# Altium PCB SLD-1550-ANR.PcbDoc
Units mm, origin at the board's own origin, x right, y up, seen from the top; angles counter-clockwise.
Board outline 100 x 54 mm, 2 copper layers (Top Layer, Bottom Layer); 4 components, 4 nets, 18 pads, 0 vias.
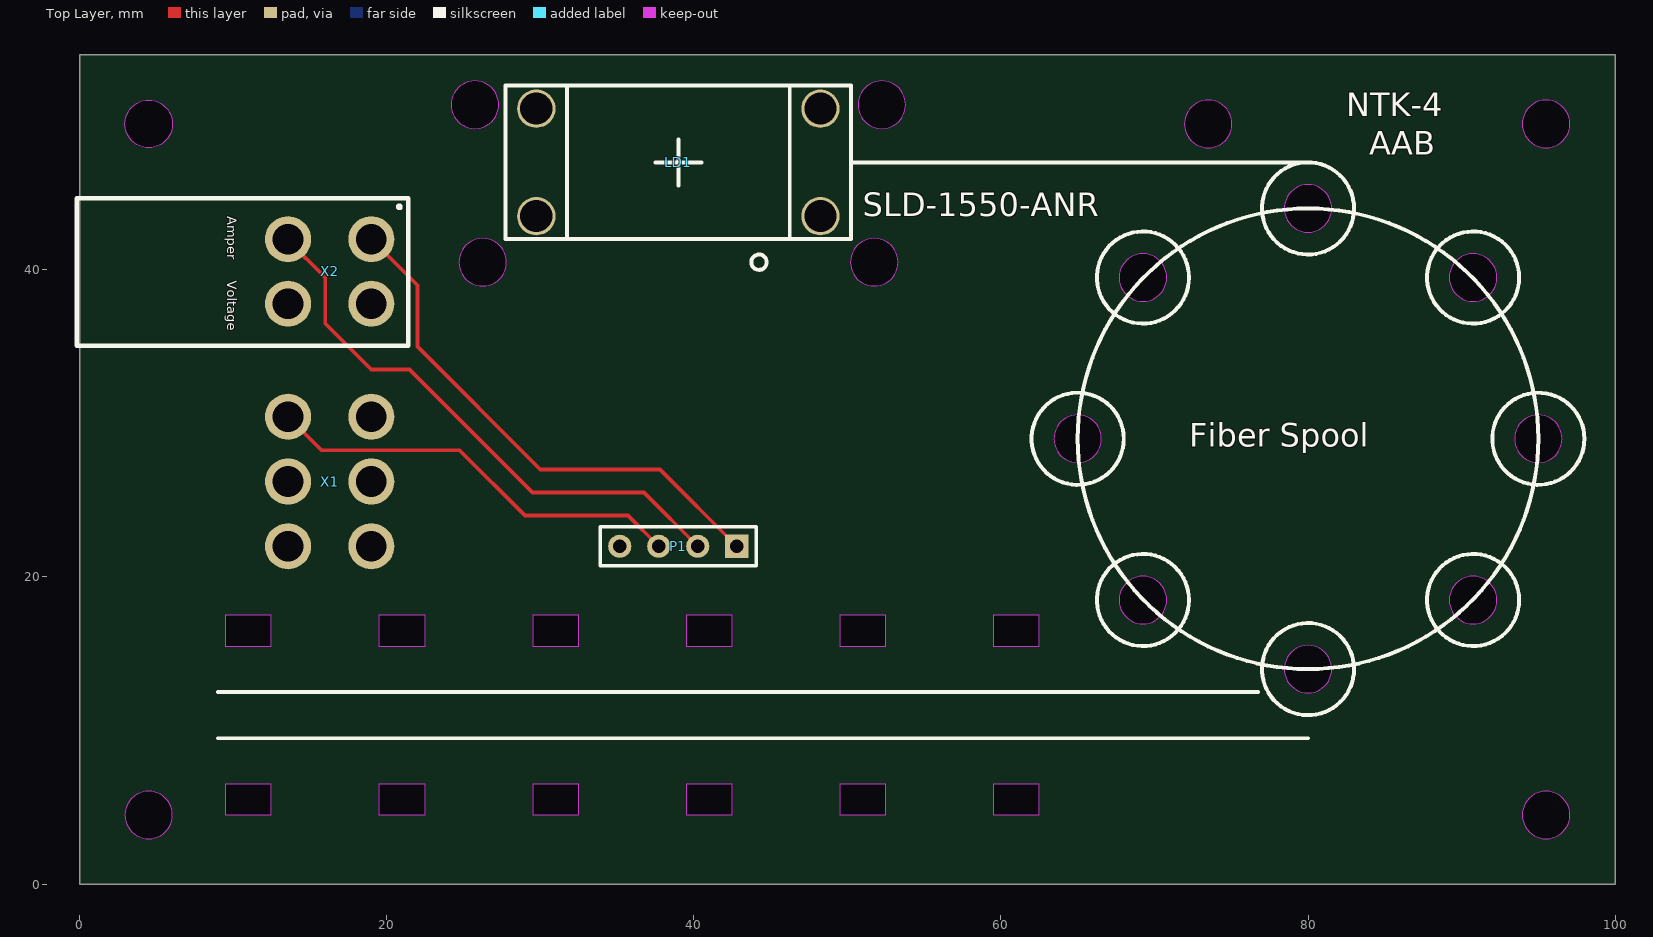
[diagram p0: Top Layer view]
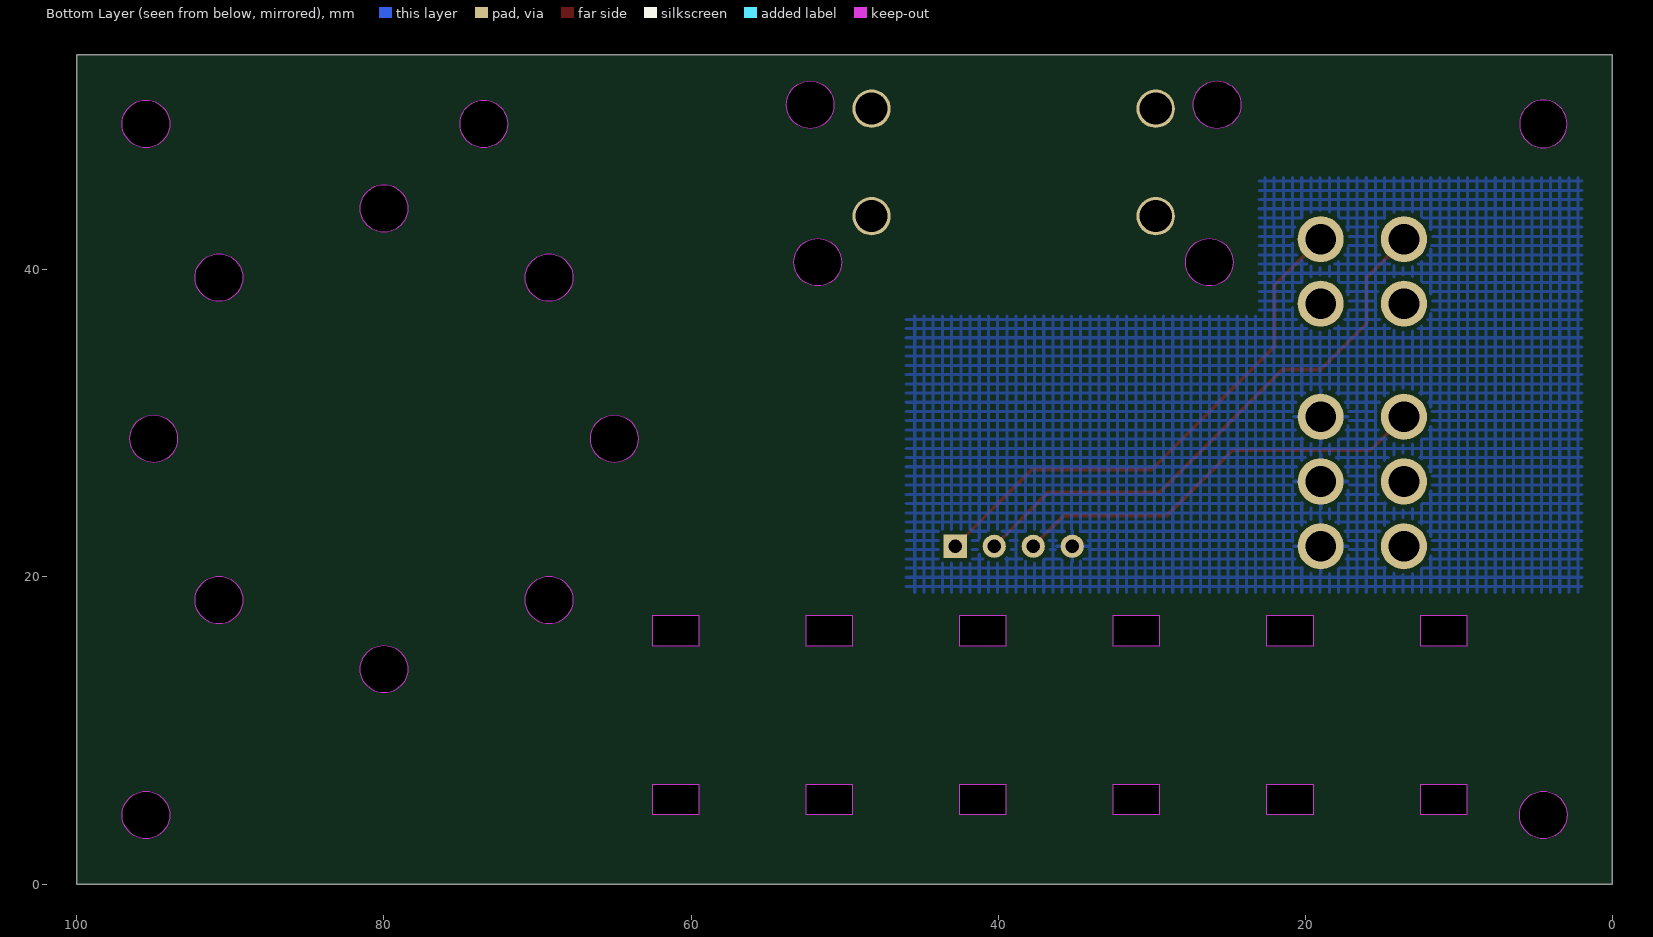
[diagram p1: Bottom Layer view, seen from below]

## Layer stack, top to bottom
Top Solder: solder mask 0.0102, Solder Resist, Dk 3.5
Top Layer: signal copper 0.0356
Dielectric 1: dielectric 0.32, FR-4, Dk 4.8
Bottom Layer: signal copper 0.0356
Bottom Solder: solder mask 0.0102, Solder Resist, Dk 3.5

## Board outline
0,0 100,0 100,54 0,54
cut-out: 93.95,4.5 ccw(c95.5,4.5) 95.5,2.95 ccw(c95.5,4.5) 97.05,4.5 ccw(c95.5,4.5) 95.5,6.05 ccw(c95.5,4.5)
cut-out: 93.95,49.5 ccw(c95.5,49.5) 95.5,47.95 ccw(c95.5,49.5) 97.05,49.5 ccw(c95.5,49.5) 95.5,51.05 ccw(c95.5,49.5)
cut-out: 71.95,49.5 ccw(c73.5,49.5) 73.5,47.95 ccw(c73.5,49.5) 75.05,49.5 ccw(c73.5,49.5) 73.5,51.05 ccw(c73.5,49.5)
cut-out: 24.7,40.5 ccw(c26.25,40.5) 26.25,38.95 ccw(c26.25,40.5) 27.8,40.5 ccw(c26.25,40.5) 26.25,42.05 ccw(c26.25,40.5)
cut-out: 50.2,40.5 ccw(c51.75,40.5) 51.75,38.95 ccw(c51.75,40.5) 53.3,40.5 ccw(c51.75,40.5) 51.75,42.05 ccw(c51.75,40.5)
cut-out: 50.7,50.75 ccw(c52.25,50.75) 52.25,49.2 ccw(c52.25,50.75) 53.8,50.75 ccw(c52.25,50.75) 52.25,52.3 ccw(c52.25,50.75)
cut-out: 24.2,50.75 ccw(c25.75,50.75) 25.75,49.2 ccw(c25.75,50.75) 27.3,50.75 ccw(c25.75,50.75) 25.75,52.3 ccw(c25.75,50.75)
cut-out: 4.5,47.95 cw(c4.5,49.5) 2.95,49.5 cw(c4.5,49.5) 4.5,51.05 cw(c4.5,49.5) 6.05,49.5 cw(c4.5,49.5)
cut-out: 2.95,4.5 ccw(c4.5,4.5) 4.5,2.95 ccw(c4.5,4.5) 6.05,4.5 ccw(c4.5,4.5) 4.5,6.05 ccw(c4.5,4.5)
cut-out: 67.7,18.5 ccw(c69.25,18.5) 69.25,16.95 ccw(c69.25,18.5) 70.8,18.5 ccw(c69.25,18.5) 69.25,20.05 ccw(c69.25,18.5)
cut-out: 78.45,14 ccw(c80,14) 80,12.45 ccw(c80,14) 81.55,14 ccw(c80,14) 80,15.55 ccw(c80,14)
cut-out: 89.2,18.5 ccw(c90.75,18.5) 90.75,16.95 ccw(c90.75,18.5) 92.3,18.5 ccw(c90.75,18.5) 90.75,20.05 ccw(c90.75,18.5)
cut-out: 93.45,29 ccw(c95,29) 95,27.45 ccw(c95,29) 96.55,29 ccw(c95,29) 95,30.55 ccw(c95,29)
cut-out: 89.2,39.5 ccw(c90.75,39.5) 90.75,37.95 ccw(c90.75,39.5) 92.3,39.5 ccw(c90.75,39.5) 90.75,41.05 ccw(c90.75,39.5)
cut-out: 78.45,44 ccw(c80,44) 80,42.45 ccw(c80,44) 81.55,44 ccw(c80,44) 80,45.55 ccw(c80,44)
cut-out: 67.7,39.5 ccw(c69.25,39.5) 69.25,37.95 ccw(c69.25,39.5) 70.8,39.5 ccw(c69.25,39.5) 69.25,41.05 ccw(c69.25,39.5)
cut-out: 63.45,29 ccw(c65,29) 65,27.45 ccw(c65,29) 66.55,29 ccw(c65,29) 65,30.55 ccw(c65,29)
cut-out: 59.5,4.5 62.5,4.5 62.5,6.5 59.5,6.5
cut-out: 49.5,4.5 52.5,4.5 52.5,6.5 49.5,6.5
cut-out: 39.5,4.5 42.5,4.5 42.5,6.5 39.5,6.5
cut-out: 29.5,4.5 32.5,4.5 32.5,6.5 29.5,6.5
cut-out: 19.5,4.5 22.5,4.5 22.5,6.5 19.5,6.5
cut-out: 9.5,4.5 12.5,4.5 12.5,6.5 9.5,6.5
cut-out: 9.5,15.5 12.5,15.5 12.5,17.5 9.5,17.5
cut-out: 19.5,15.5 22.5,15.5 22.5,17.5 19.5,17.5
cut-out: 29.5,15.5 32.5,15.5 32.5,17.5 29.5,17.5
cut-out: 39.5,15.5 42.5,15.5 42.5,17.5 39.5,17.5
cut-out: 49.5,15.5 52.5,15.5 52.5,17.5 49.5,17.5
cut-out: 59.5,15.5 62.5,15.5 62.5,17.5 59.5,17.5

## Design rules (kind name [scope] priority, off if disabled: settings)
Clearance [All] p1: gap=0.254 ignorepadtopadclearanceinfootprint=FALSE except(0: Arc-Hole Track-Hole SMDPad-Hole THPad-Hole Via-Hole Fill-Hole Poly-Hole Region-Hole Text-Hole)
PolygonConnect [All] p1: connectstyle=Relief reliefconductorwidth=0.254 reliefentries=4 polygonreliefangle="90 Angle" airgapwidth=0.254
RoutingVias [All] p1: holewidth=0.711 width=1.27 viastyle="Through Hole" minholewidth=0.711 minwidth=1.27 maxholewidth=0.711 maxwidth=1.27
SolderMaskExpansion [All] p1: expansion=0.102
Width [All] p1: maxlimit=0.254 minlimit=0.254 preferedwidth=0.254
30 further rules are at their usual default settings.

## Components (designator, comment, footprint, x,y, rotation, side; value= is the part's Value field where it differs from the comment)
LD1 "SLD-1550-ANR" СЛД-1550-АНР 39,47 r270 top
P1 "Header 4" HDR1X4 42.8,22 r180 top
X1 "POWER" POWER 19,22 r90 top
X2 "AMPVOLT" AMP_VOLTMETER 19,42 r270 top

## Footprints (in the part's own frame and the unit in brackets; to place one, negate y for a bottom-side part, rotate by r counter-clockwise, add the part's x,y. Pads: shape width x height; smd on the part's side, far side on the other; paste and mask are expansions set on the pad)
AMP_VOLTMETER [mm] "AMP_VOLTMETER"
  round 3 hole 2: 1(0,0) 2(0,-5.423) 3(4.2,-5.423) 4(4.2,0)
  silkscreen extent -2.66,-19.17 6.94,2.42
HDR1X4 [mm] "Connector; Header; 4 Position"
  rect 1.5x1.5 hole 0.9: 1(0,0)
  round 1.5 hole 0.9: 2(2.54,0) 3(5.08,0) 4(7.62,0)
  silkscreen extent -1.27,-1.27 8.89,1.27
POWER [mm] "POWER"
  round 3 hole 2: 1(8.435,5.422) 2(4.217,5.422) 3(0,5.422) 4(8.435,0) 5(4.217,0) 6(0,0)
СЛД-1550-АНР [mm]
  round 2.5 hole 2.1: 0(-3.5,-9.25) 0(-3.5,9.25) 0(3.5,9.25) 0(3.5,-9.25)
  silkscreen extent -5,-11.25 7,14.25, body extent -5,-11.25 15,29.25, height 4

## Part data
P1: "Header, 4-Pin", LatestRevisionDate=17-Jul-2002, LatestRevisionNote="Re-released for DXP Platform.", Publisher="Altium Limited"
X2: library part AMP_VOLTMETER

## Nets (pads, with @x,y where several pads share a name; then routed paths per layer and width w, separated by ;. In a path a pad name is that pad's centre, name@x,y a point inside that pad or via, vN(x,y) a via of type N, cw(c..) or ccw(c..) an arc to the next point about the centre after c; other vN are vias at no path point)
"Channel 0": P1.3 X1.1 | length 27.6
  Top Layer w0.254: X1.1 15.763,28.25 24.75,28.25 29,24 35.72,24 P1.3
GND: P1.4 X1.4 X1.5 X1.6
"LD1 Term1": P1.1 X2.1 | length 34.4
  Top Layer w0.254: X2.1 22,39 22,35 30,27 37.8,27 P1.1
"LD1 Term2": P1.2 X2.2 | length 36.8
  Top Layer w0.254: X2.2 13.577,41.923 16,39.5 16,36.5 19,33.5 21.5,33.5 29.5,25.5 36.76,25.5 P1.2
pads on no net: LD1.0 X1.2 X1.3 X2.3 X2.4

## Polygon pours and split planes (outlines as drawn)
GND on Bottom Layer "GND_L02_P266" (hatched 90Degree grid 0.6 track 0.2, remove dead copper, pour order 266): 2,46 23,46 23,37 46,37 46,19 2,19
no net on Bottom Layer "NONET_L02_P064" (hatched 90Degree grid 0.6 track 0.2, remove dead copper, pour order 64): 8,42
GND on Bottom Layer "GND_L02_P036" (hatched 90Degree grid 0.6 track 0.2, remove dead copper, pour order 36): 27,49
GND on Bottom Layer "GND_L02_P034" (hatched 90Degree grid 0.6 track 0.2, remove dead copper, pour order 34): 33,49
GND on Bottom Layer "GND_L02_P032" (hatched 90Degree grid 0.6 track 0.2, remove dead copper, pour order 32): 26,48.78
GND on Bottom Layer "GND_L02_P030" (hatched 90Degree grid 0.6 track 0.2, remove dead copper, pour order 30): 25.835,52
GND on Bottom Layer "GND_L02_P026" (hatched 90Degree grid 0.6 track 0.2, remove dead copper, pour order 26): 2,40
GND on Bottom Layer "GND_L02_P006" (hatched Horizontal grid 0.6 track 0.2, remove dead copper, pour order 6): 2,18
no net on Bottom Layer "NONET_L02_P002" (hatched 90Degree grid 0.6 track 0.2, pour order 2): 2.5,17.5
no net on Bottom Layer "NONET_L02_P000" (hatched 90Degree grid 0.6 track 0.2, pour order 0): 2.5,17.5

## Silkscreen, mask and mechanical layers (free items; w line width, h text height)
Top Overlay:
  circle w0.254: c95,29 r3
  circle w0.254: c90.75,39.5 r3
  circle w0.254: c80,44 r3
  circle w0.254: c69.25,39.5 r3
  circle w0.254: c65,29 r3
  circle w0.254: c90.75,18.5 r3
  circle w0.254: c80,14 r3
  circle w0.254: c69.25,18.5 r3
  circle w0.254: c80,29 r15
  lines w0.254: 9,9.5 80,9.5 ; 9,12.5 76.75,12.5 ; 37.5,47 40.5,47 ; 39,45.5 39,48.5 ; 50.25,47 80,47
  text "NTK-4" at 82.5,50 h1.52
  text "AAB" at 84,47.5 h1.52
  text "SLD-1550-ANR" at 51,43.5 h1.52
  text "Fiber Spool" at 72.256,28.492 h1.52
Mechanical 1:
  circle w0.254: c4.5,4.5 r1.55
  circle w0.254: c95.5,4.5 r1.55
  circle w0.254: c95.5,49.5 r1.55
  circle w0.254: c73.5,49.5 r1.55
  circle w0.254: c4.5,49.5 r1.55
  circle w0.254: c52.25,50.75 r1.55
  circle w0.254: c25.75,50.75 r1.55
  circle w0.254: c26.25,40.5 r1.55
  circle w0.254: c51.75,40.5 r1.55
  circle w0.254: c69.25,18.5 r1.55
  circle w0.254: c80,14 r1.55
  circle w0.254: c90.75,18.5 r1.55
  circle w0.254: c95,29 r1.55
  circle w0.254: c90.75,39.5 r1.55
  circle w0.254: c80,44 r1.55
  circle w0.254: c69.25,39.5 r1.55
  circle w0.254: c65,29 r1.55
  lines w0.254: 0,0 0,54 100,54 100,0 0,0 ; 9.5,4.5 12.5,4.5 12.5,6.5 9.5,6.5 9.5,4.5 ; 9.5,15.5 12.5,15.5 12.5,17.5 9.5,17.5 9.5,15.5 ; 19.5,4.5 22.5,4.5 22.5,6.5 19.5,6.5 19.5,4.5 ; 19.5,15.5 19.5,17.5 22.5,17.5 22.5,15.5 19.5,15.5 ; 29.5,4.5 32.5,4.5 32.5,6.5 29.5,6.5 29.5,4.5 ; 29.5,15.5 29.5,17.5 32.5,17.5 32.5,15.5 29.5,15.5 ; 39.5,4.5 42.5,4.5 42.5,6.5 39.5,6.5 39.5,4.5 ; 39.5,15.5 39.5,17.5 42.5,17.5 42.5,15.5 39.5,15.5 ; 49.5,4.5 52.5,4.5 52.5,6.5 49.5,6.5 49.5,4.5 ; 49.5,15.5 49.5,17.5 52.5,17.5 52.5,15.5 49.5,15.5 ; 59.5,4.5 62.5,4.5 62.5,6.5 59.5,6.5 59.5,4.5 ; 59.5,15.5 59.5,17.5 62.5,17.5 62.5,15.5 59.5,15.5

## Text inside footprints (layer, text, board x,y; h text height)
X2: Top Overlay "Voltage" at 9.623,39.304 h0.63 r270; Top Overlay "Amper" at 9.623,43.504 h0.63 r270